# EAGLE board USBboard (EAGLE 7.4.0)
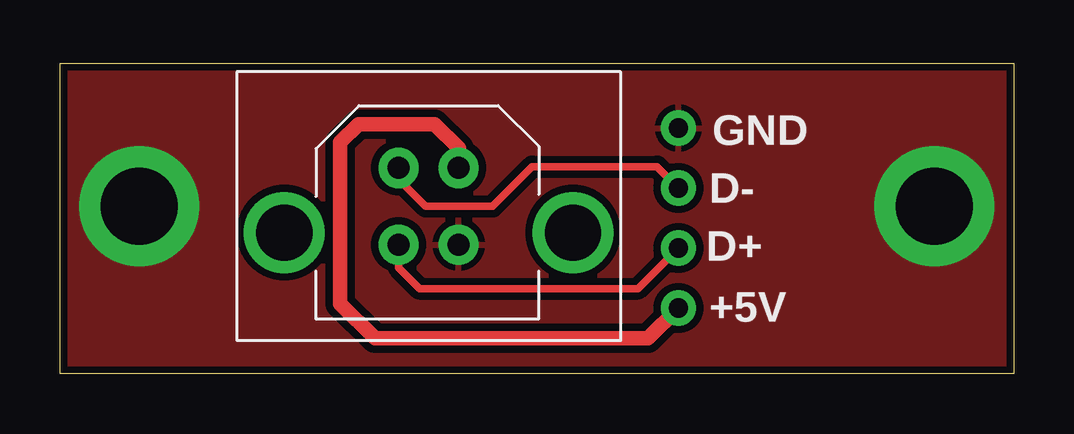
[diagram p0: board, top side]
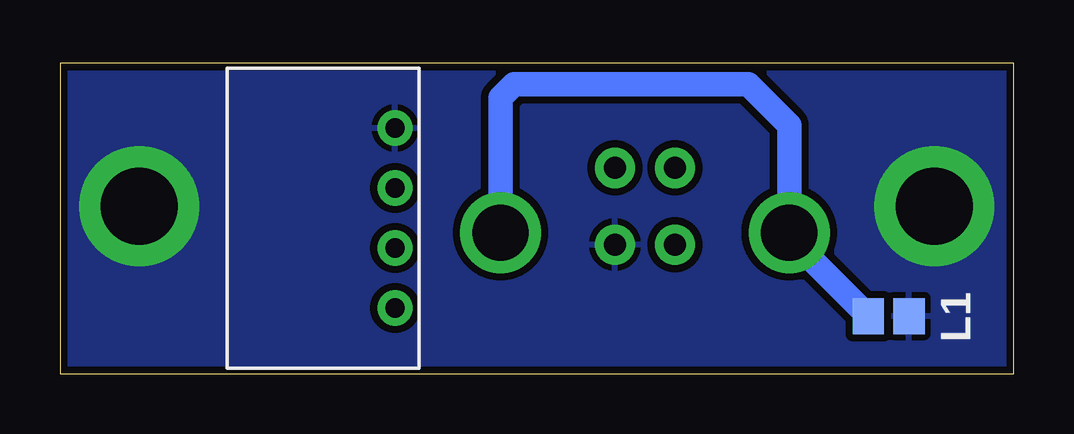
[diagram p1: board, bottom side, seen from below]

Size 39.75 x 12.95 mm. Coordinates in mm from the lower left corner, seen from the top.
Outline: 39.75,12.95 39.75,0 0,0 0,12.95 39.75,12.95
Copper layers (1*16): Top 0.035mm / dielectric 1.5mm / Bottom 0.035mm
Design rules "smiery": minimum track width 10mil, minimum drill 12mil, track to track 7mil, track to pad 5mil, pad to pad 5mil, via to via 6mil, smd to smd 0mil, copper to edge 12mil, drill to drill 10mil, minimum pad ring 13mil, minimum via ring 10mil, stop-mask expansion 2mil, vias tented up to drill 25mil, thermal gap 10mil

## Footprints (pad centres in the part's own frame; a part is rotated, then mirrored left to right if it is on the bottom)
USB-B-PTH-V = drill 0.914 pad 1.676: D+ -1.25,-1.6; D- -1.25,1.6; GND 1.25,-1.6; VBUS 1.25,1.6 | drill 2.35: S1 -6.02,-1.1; S2 6.02,-1.1
JST-XH-04P-H = drill 0.8: 1 -3.73,0; 2 -1.23,0; 3 1.27,0; 4 3.77,0
L0805 = smd 1.3 x 1.5: 1 -0.85,0; 2 0.85,0

## Placement (x,y rotation side)
CONN1  USB-B-V  [USB-B-PTH-V]  15.37,6.99 0 top
CONN2  PINHD-1X04-JST-XH-H  [JST-XH-04P-H]  25.78,6.48 90 bottom
L1  FERRITE_BEAD-BLM21PG221SN1D  [L0805]  5.21,2.41 0 bottom

## Library data of the parts
CONN1 = igor_lbr; MANUFACTURER: CUI Devices; MPN: UJ2-BV-1-TH
CONN2 = igor_lbr
L1 = igor_lbr; MANUFACTURER: Murata; MPN: BLM21PG221SN1D

## Nets
+5V: CONN1.VBUS CONN2.1
D+: CONN1.D+ CONN2.2
D-: CONN1.D- CONN2.3
GND: CONN1.GND CONN2.4 L1.2
N$1: CONN1.S1 CONN1.S2 L1.1

## Tracks (layer width: path | path; a pad name or v marks a point on that pad's centre or on a via)
+5V
  Top 0.61: CONN1.VBUS 16.64,8.61 16.64,9.4 15.62,10.41 12.45,10.41 11.68,9.65 11.68,2.92 13.13,1.48 24.51,1.48 CONN2.1
D+
  Top 0.305: CONN1.D+ 14.12,4.42 14.99,3.56 24.09,3.56 CONN2.2
D-
  Top 0.305: CONN1.D- 14.12,8.11 15.24,6.99 18.03,6.99 19.68,8.64 24.89,8.64 CONN2.3
GND  (via drill 3.2 pad 5)
  other vias: 3.3,6.99 36.45,6.99
  pour Top (isolate 0.305): 0,12.95 0,0 39.75,0 39.75,12.95
  pour Bottom (isolate 0.305): 0,12.95 0,0 39.75,0 39.75,12.95
N$1
  Bottom 1.016: CONN1.S2 21.39,11.51 20.83,12.06 11.05,12.06 9.35,10.36 CONN1.S1 9.35,5.7 L1.1

## Text on the board
tNames: GND | D- | D+ | +5V